# EAGLE board Mono_Audio_Amp-TPA2005D1_Panel_v11 (EAGLE 7.4.0), part 1 of 5
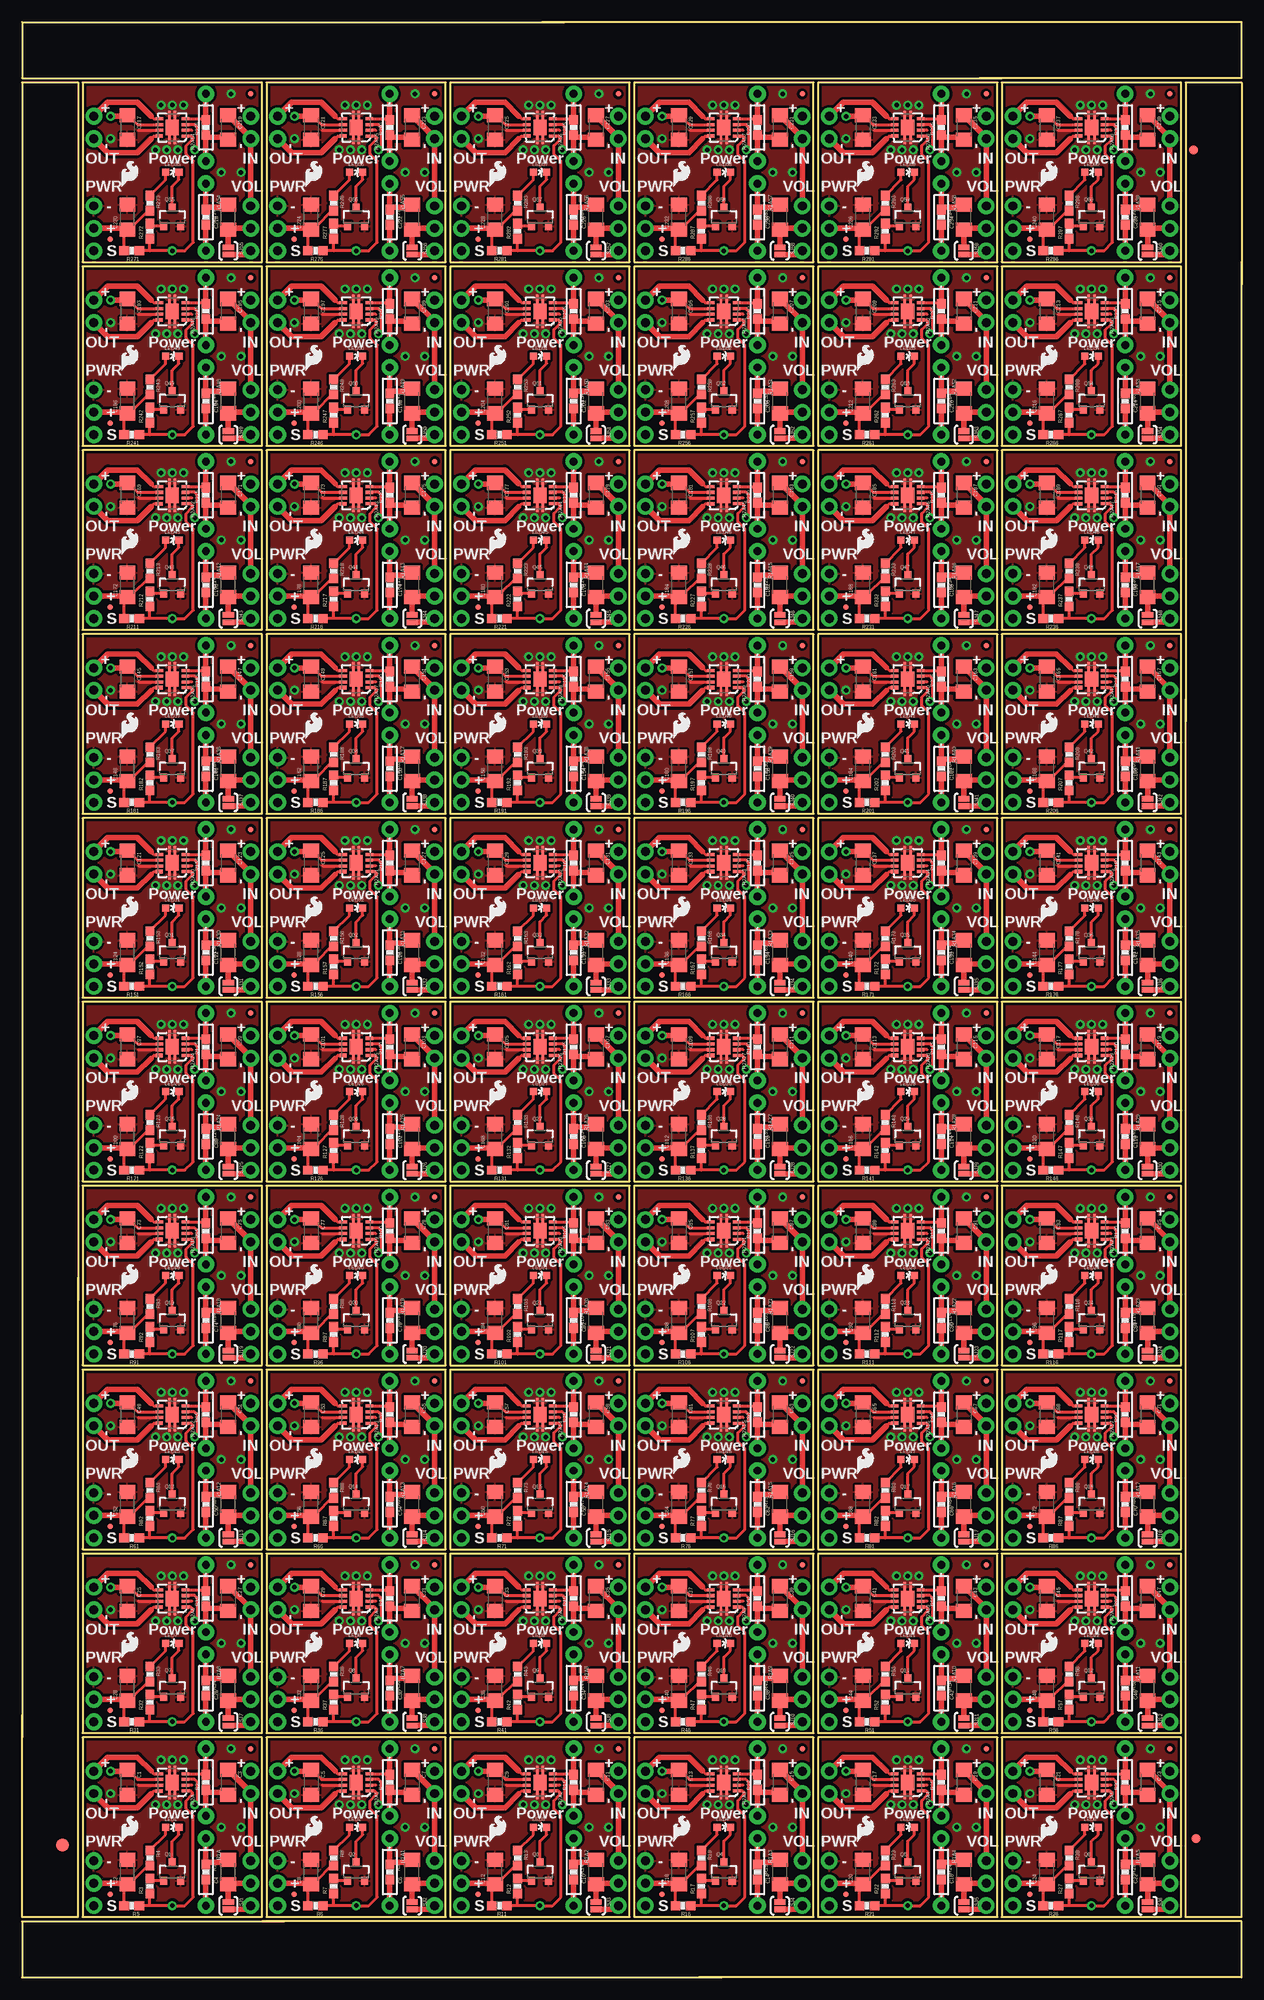
[diagram p0: board, top side]
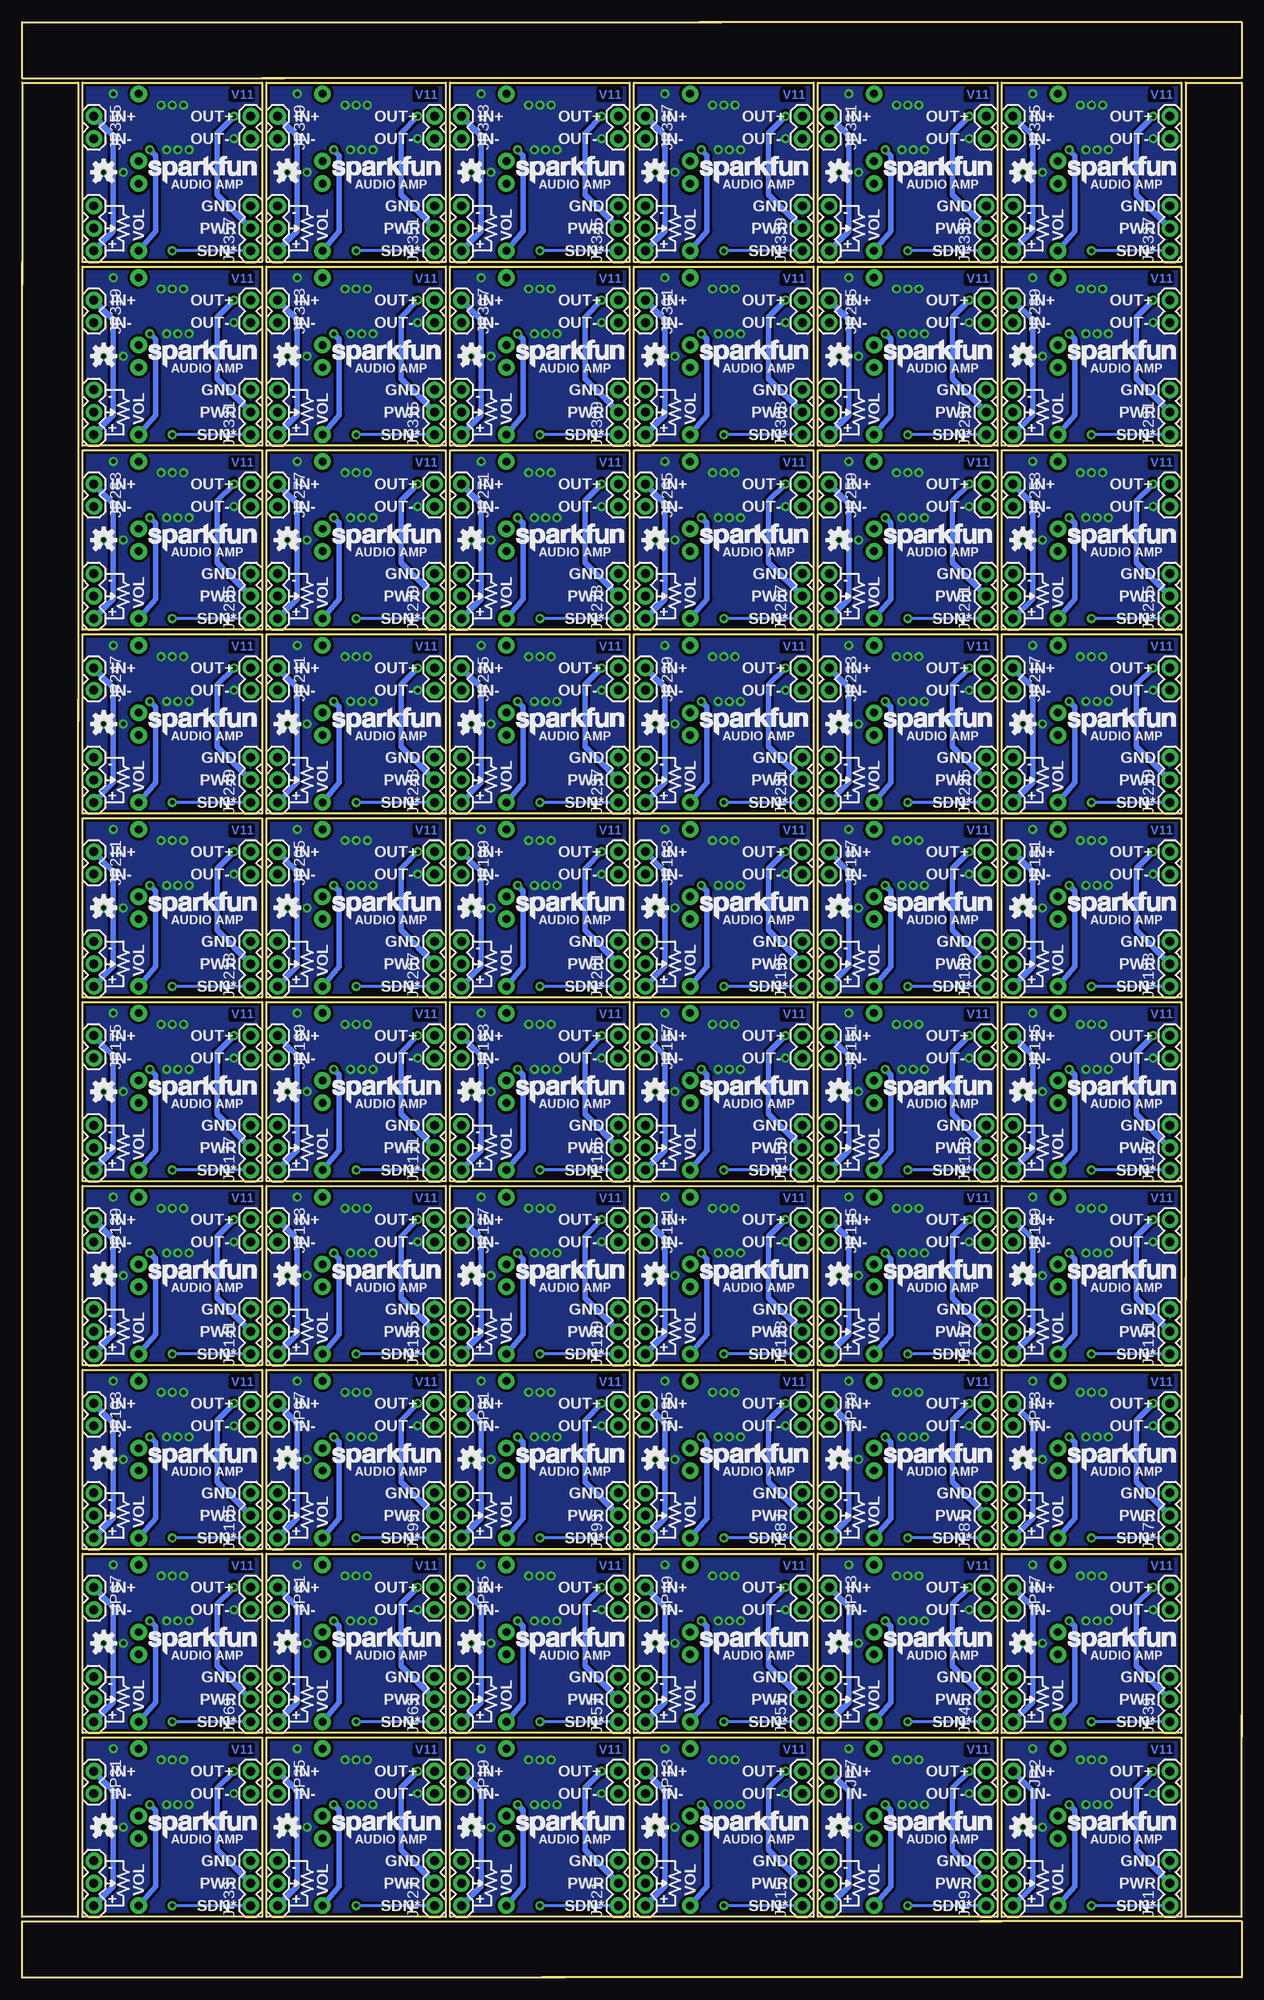
[diagram p1: board, bottom side, seen from below]

Size 138.18 x 221.49 mm. Coordinates in mm from the lower left corner, seen from the top.
Outline: 264 segments
Copper layers (1*16): Top 0.035mm / dielectric 1.5mm / Bottom 0.035mm
Design rules "default": minimum track width 8mil, minimum drill 20mil, track to track 8mil, track to pad 8mil, pad to pad 8mil, via to via 8mil, smd to smd 8mil, copper to edge 8mil, drill to drill 8mil, minimum pad ring 12mil, minimum via ring 10mil, stop-mask expansion 4mil, vias tented up to drill 20mil, thermal gap 10mil
Net classes: 0 default: clearance 0.254 mm; 1 VCC: width 0.254 mm, clearance 0.254 mm

## Footprints (pad centres in the part's own frame; a part is rotated, then mirrored left to right if it is on the bottom)
1206 = smd 1.6 x 1.8: 1 -1.4,0; 2 1.4,0
FIDUCIAL-1.5X3 = smd 1.5 x 1.5: 1 0,0
FIDUCIAL-1X2 = smd 1 x 1: 1 0,0
1X03 = drill 1.016 pad 1.88: 1 0,0; 2 2.54,0; 3 5.08,0
1X02 = drill 1.016 pad 1.88: 1 0,0; 2 2.54,0
MICRO-FIDUCIAL = smd 0.635 x 0.635: 1 0,0
LED-0603 = smd 0.8 x 0.8: A 0,-0.75; C 0,0.75
SOT23-3 = smd 0.8 x 0.9: 1 -0.95,-1; 2 0.95,-1; 3 0,1.1
0603-RES = smd 1.1 x 1: 1 -0.85,0; 2 0.85,0
AXIAL-0.3 = drill 0.9 pad 1.88: P$1 -3.81,0; P$2 3.81,0
SJ_2S-NOTRACE = smd 0.635 x 1.27: 1 -0.401,0; 2 0.413,0
QFN-8_PAD = smd 0.35 x 0.85: 1 -0.975,-1.475; 2 -0.325,-1.475; 3 0.325,-1.475; 4 0.975,-1.475; 5 0.975,1.475; 6 0.325,1.475; 7 -0.325,1.475; 8 -0.975,1.475 | smd 1.75 x 1.5: 9 0,0 | smd 1.025 x 0.28: 10 -1.387,-0.325; 11 1.387,-0.325; 12 1.387,0.325; 13 -1.387,0.325

## Placement (x,y rotation side)
C1  1uF  [1206]  11.94,22.1 270 top
C2  10uF  [1206]  11.94,11.94 90 top
C3  1uF  [1206]  23.37,22.1 270 top
C4  1uF  [1206]  23.37,11.94 90 top
C5  1uF  [1206]  32.77,22.1 270 top
C6  1uF  [1206]  44.2,11.94 90 top
C7  1uF  [1206]  44.2,22.1 270 top
C8  10uF  [1206]  32.77,11.94 90 top
C9  1uF  [1206]  53.59,22.1 270 top
C10  1uF  [1206]  65.02,11.94 90 top
C11  1uF  [1206]  65.02,22.1 270 top
C12  10uF  [1206]  53.59,11.94 90 top
C13  1uF  [1206]  74.42,22.1 270 top
C14  1uF  [1206]  85.85,11.94 90 top
C15  1uF  [1206]  85.85,22.1 270 top
C16  10uF  [1206]  74.42,11.94 90 top
C17  1uF  [1206]  95.25,22.1 270 top
C18  1uF  [1206]  106.68,11.94 90 top
C19  1uF  [1206]  106.68,22.1 270 top
C20  10uF  [1206]  95.25,11.94 90 top
C21  1uF  [1206]  116.08,22.1 270 top
C22  1uF  [1206]  127.51,11.94 90 top
C23  1uF  [1206]  127.51,22.1 270 top
C24  10uF  [1206]  116.08,11.94 90 top
C25  1uF  [1206]  11.94,42.93 270 top
C26  1uF  [1206]  23.37,32.77 90 top
C27  1uF  [1206]  23.37,42.93 270 top
C28  10uF  [1206]  11.94,32.77 90 top
C29  1uF  [1206]  32.77,42.93 270 top
C30  1uF  [1206]  44.2,32.77 90 top
C31  1uF  [1206]  44.2,42.93 270 top
C32  10uF  [1206]  32.77,32.77 90 top
C33  1uF  [1206]  53.59,42.93 270 top
C34  1uF  [1206]  65.02,32.77 90 top
C35  1uF  [1206]  65.02,42.93 270 top
C36  10uF  [1206]  53.59,32.77 90 top
C37  1uF  [1206]  74.42,42.93 270 top
C38  1uF  [1206]  85.85,32.77 90 top
C39  1uF  [1206]  85.85,42.93 270 top
C40  10uF  [1206]  74.42,32.77 90 top
C41  1uF  [1206]  95.25,42.93 270 top
C42  1uF  [1206]  106.68,32.77 90 top
C43  1uF  [1206]  106.68,42.93 270 top
C44  10uF  [1206]  95.25,32.77 90 top
C45  1uF  [1206]  116.08,42.93 270 top
C46  1uF  [1206]  127.51,32.77 90 top
C47  1uF  [1206]  127.51,42.93 270 top
C48  10uF  [1206]  116.08,32.77 90 top
C49  1uF  [1206]  11.94,63.75 270 top
C50  1uF  [1206]  23.37,53.59 90 top
C51  1uF  [1206]  23.37,63.75 270 top
C52  10uF  [1206]  11.94,53.59 90 top
C53  1uF  [1206]  32.77,63.75 270 top
C54  1uF  [1206]  44.2,53.59 90 top
C55  1uF  [1206]  44.2,63.75 270 top
C56  10uF  [1206]  32.77,53.59 90 top
C57  1uF  [1206]  53.59,63.75 270 top
C58  1uF  [1206]  65.02,53.59 90 top
C59  1uF  [1206]  65.02,63.75 270 top
C60  10uF  [1206]  53.59,53.59 90 top
C61  1uF  [1206]  74.42,63.75 270 top
C62  1uF  [1206]  85.85,53.59 90 top
C63  1uF  [1206]  85.85,63.75 270 top
C64  10uF  [1206]  74.42,53.59 90 top
C65  1uF  [1206]  95.25,63.75 270 top
C66  1uF  [1206]  106.68,53.59 90 top
C67  1uF  [1206]  106.68,63.75 270 top
C68  10uF  [1206]  95.25,53.59 90 top
C69  1uF  [1206]  116.08,63.75 270 top
C70  1uF  [1206]  127.51,53.59 90 top
C71  1uF  [1206]  127.51,63.75 270 top
C72  10uF  [1206]  116.08,53.59 90 top
C73  1uF  [1206]  11.94,84.58 270 top
C74  1uF  [1206]  23.37,74.42 90 top
C75  1uF  [1206]  23.37,84.58 270 top
C76  10uF  [1206]  11.94,74.42 90 top
C77  1uF  [1206]  32.77,84.58 270 top
C78  1uF  [1206]  44.2,74.42 90 top
C79  1uF  [1206]  44.2,84.58 270 top
C80  10uF  [1206]  32.77,74.42 90 top
C81  1uF  [1206]  53.59,84.58 270 top
C82  1uF  [1206]  65.02,74.42 90 top
C83  1uF  [1206]  65.02,84.58 270 top
C84  10uF  [1206]  53.59,74.42 90 top
C85  1uF  [1206]  74.42,84.58 270 top
C86  1uF  [1206]  85.85,74.42 90 top
C87  1uF  [1206]  85.85,84.58 270 top
C88  10uF  [1206]  74.42,74.42 90 top
C89  1uF  [1206]  95.25,84.58 270 top
C90  1uF  [1206]  106.68,74.42 90 top
C91  1uF  [1206]  106.68,84.58 270 top
C92  10uF  [1206]  95.25,74.42 90 top
C93  1uF  [1206]  116.08,84.58 270 top
C94  1uF  [1206]  127.51,74.42 90 top
C95  1uF  [1206]  127.51,84.58 270 top
C96  10uF  [1206]  116.08,74.42 90 top
C97  1uF  [1206]  11.94,105.41 270 top
C98  1uF  [1206]  23.37,95.25 90 top
C99  1uF  [1206]  23.37,105.41 270 top
C100  10uF  [1206]  11.94,95.25 90 top
C101  1uF  [1206]  32.77,105.41 270 top
C102  1uF  [1206]  44.2,95.25 90 top
C103  1uF  [1206]  44.2,105.41 270 top
C104  10uF  [1206]  32.77,95.25 90 top
C105  1uF  [1206]  53.59,105.41 270 top
C106  1uF  [1206]  65.02,95.25 90 top
C107  1uF  [1206]  65.02,105.41 270 top
C108  10uF  [1206]  53.59,95.25 90 top
C109  1uF  [1206]  74.42,105.41 270 top
C110  1uF  [1206]  85.85,95.25 90 top
C111  1uF  [1206]  85.85,105.41 270 top
C112  10uF  [1206]  74.42,95.25 90 top
C113  1uF  [1206]  95.25,105.41 270 top
C114  1uF  [1206]  106.68,95.25 90 top
C115  1uF  [1206]  106.68,105.41 270 top
C116  10uF  [1206]  95.25,95.25 90 top
C117  1uF  [1206]  116.08,105.41 270 top
C118  1uF  [1206]  127.51,95.25 90 top
C119  1uF  [1206]  127.51,105.41 270 top
C120  10uF  [1206]  116.08,95.25 90 top
C121  1uF  [1206]  11.94,126.24 270 top
C122  1uF  [1206]  23.37,116.08 90 top
C123  1uF  [1206]  23.37,126.24 270 top
C124  10uF  [1206]  11.94,116.08 90 top
C125  1uF  [1206]  32.77,126.24 270 top
C126  1uF  [1206]  44.2,116.08 90 top
C127  1uF  [1206]  44.2,126.24 270 top
C128  10uF  [1206]  32.77,116.08 90 top
C129  1uF  [1206]  53.59,126.24 270 top
C130  1uF  [1206]  65.02,116.08 90 top
C131  1uF  [1206]  65.02,126.24 270 top
C132  10uF  [1206]  53.59,116.08 90 top
C133  1uF  [1206]  74.42,126.24 270 top
C134  1uF  [1206]  85.85,116.08 90 top
C135  1uF  [1206]  85.85,126.24 270 top
C136  10uF  [1206]  74.42,116.08 90 top
C137  1uF  [1206]  95.25,126.24 270 top
C138  1uF  [1206]  106.68,116.08 90 top
C139  1uF  [1206]  106.68,126.24 270 top
C140  10uF  [1206]  95.25,116.08 90 top
C141  1uF  [1206]  116.08,126.24 270 top
C142  1uF  [1206]  127.51,116.08 90 top
C143  1uF  [1206]  127.51,126.24 270 top
C144  10uF  [1206]  116.08,116.08 90 top
C145  1uF  [1206]  11.94,147.07 270 top
C146  1uF  [1206]  23.37,136.91 90 top
C147  1uF  [1206]  23.37,147.07 270 top
C148  10uF  [1206]  11.94,136.91 90 top
C149  1uF  [1206]  32.77,147.07 270 top
C150  1uF  [1206]  44.2,136.91 90 top
C151  1uF  [1206]  44.2,147.07 270 top
C152  10uF  [1206]  32.77,136.91 90 top
C153  1uF  [1206]  53.59,147.07 270 top
C154  1uF  [1206]  65.02,136.91 90 top
C155  1uF  [1206]  65.02,147.07 270 top
C156  10uF  [1206]  53.59,136.91 90 top
C157  1uF  [1206]  74.42,147.07 270 top
C158  1uF  [1206]  85.85,136.91 90 top
C159  1uF  [1206]  85.85,147.07 270 top
C160  10uF  [1206]  74.42,136.91 90 top
C161  1uF  [1206]  95.25,147.07 270 top
C162  1uF  [1206]  106.68,136.91 90 top
C163  1uF  [1206]  106.68,147.07 270 top
C164  10uF  [1206]  95.25,136.91 90 top
C165  1uF  [1206]  116.08,147.07 270 top
C166  1uF  [1206]  127.51,136.91 90 top
C167  1uF  [1206]  127.51,147.07 270 top
C168  10uF  [1206]  116.08,136.91 90 top
C169  1uF  [1206]  11.94,167.89 270 top
C170  1uF  [1206]  23.37,157.73 90 top
C171  1uF  [1206]  23.37,167.89 270 top
C172  10uF  [1206]  11.94,157.73 90 top
C173  1uF  [1206]  32.77,167.89 270 top
C174  1uF  [1206]  44.2,157.73 90 top
C175  1uF  [1206]  44.2,167.89 270 top
C176  10uF  [1206]  32.77,157.73 90 top
C177  1uF  [1206]  53.59,167.89 270 top
C178  1uF  [1206]  65.02,157.73 90 top
C179  1uF  [1206]  65.02,167.89 270 top
C180  10uF  [1206]  53.59,157.73 90 top
C181  1uF  [1206]  74.42,167.89 270 top
C182  1uF  [1206]  85.85,157.73 90 top
C183  1uF  [1206]  85.85,167.89 270 top
C184  10uF  [1206]  74.42,157.73 90 top
C185  1uF  [1206]  95.25,167.89 270 top
C186  1uF  [1206]  106.68,157.73 90 top
C187  1uF  [1206]  106.68,167.89 270 top
C188  10uF  [1206]  95.25,157.73 90 top
C189  1uF  [1206]  116.08,167.89 270 top
C190  1uF  [1206]  127.51,157.73 90 top
C191  1uF  [1206]  127.51,167.89 270 top
C192  10uF  [1206]  116.08,157.73 90 top
C193  1uF  [1206]  11.94,188.72 270 top
C194  1uF  [1206]  23.37,178.56 90 top
C195  1uF  [1206]  23.37,188.72 270 top
C196  10uF  [1206]  11.94,178.56 90 top
C197  1uF  [1206]  32.77,188.72 270 top
C198  1uF  [1206]  44.2,178.56 90 top
C199  1uF  [1206]  44.2,188.72 270 top
C200  10uF  [1206]  32.77,178.56 90 top
C201  1uF  [1206]  53.59,188.72 270 top
C202  1uF  [1206]  65.02,178.56 90 top
C203  1uF  [1206]  65.02,188.72 270 top
C204  10uF  [1206]  53.59,178.56 90 top
C205  1uF  [1206]  74.42,188.72 270 top
C206  1uF  [1206]  85.85,178.56 90 top
C207  1uF  [1206]  85.85,188.72 270 top
C208  10uF  [1206]  74.42,178.56 90 top
C209  1uF  [1206]  95.25,188.72 270 top
C210  1uF  [1206]  106.68,178.56 90 top
C211  1uF  [1206]  106.68,188.72 270 top
C212  10uF  [1206]  95.25,178.56 90 top
C213  1uF  [1206]  116.08,188.72 270 top
C214  1uF  [1206]  127.51,178.56 90 top
C215  1uF  [1206]  127.51,188.72 270 top
C216  10uF  [1206]  116.08,178.56 90 top
C217  1uF  [1206]  11.94,209.55 270 top
C218  1uF  [1206]  23.37,199.39 90 top
C219  1uF  [1206]  23.37,209.55 270 top
C220  10uF  [1206]  11.94,199.39 90 top
C221  1uF  [1206]  32.77,209.55 270 top
C222  1uF  [1206]  44.2,199.39 90 top
C223  1uF  [1206]  44.2,209.55 270 top
C224  10uF  [1206]  32.77,199.39 90 top
C225  1uF  [1206]  53.59,209.55 270 top
C226  1uF  [1206]  65.02,199.39 90 top
C227  1uF  [1206]  65.02,209.55 270 top
C228  10uF  [1206]  53.59,199.39 90 top
C229  1uF  [1206]  74.42,209.55 270 top
C230  1uF  [1206]  85.85,199.39 90 top
C231  1uF  [1206]  85.85,209.55 270 top
C232  10uF  [1206]  74.42,199.39 90 top
C233  1uF  [1206]  95.25,209.55 270 top
C234  1uF  [1206]  106.68,199.39 90 top
C235  1uF  [1206]  106.68,209.55 270 top
C236  10uF  [1206]  95.25,199.39 90 top
C237  1uF  [1206]  116.08,209.55 270 top
C238  1uF  [1206]  127.51,199.39 90 top
C239  1uF  [1206]  127.51,209.55 270 top
C240  10uF  [1206]  116.08,199.39 90 top
E$1  [FIDUCIAL-1.5X3]  4.57,14.99 0 top
E$2  [FIDUCIAL-1X2]  132.97,15.75 180 top
E$5  [FIDUCIAL-1X2]  132.72,207.01 180 top
JP1  POWER  [1X03]  8.13,8.13 90 bottom
JP2  IN  [1X02]  25.91,23.37 270 bottom
JP3  OUT  [1X02]  8.13,23.37 270 bottom
JP4  VOLUME  [1X03]  25.91,8.13 90 bottom
JP5  FIDUCIALUFIDUCIAL  [MICRO-FIDUCIAL]  10.01,9.42 0 top
JP6  FIDUCIALUFIDUCIAL  [MICRO-FIDUCIAL]  25.91,25.91 0 top
JP7  IN  [1X02]  46.74,23.37 270 bottom
JP8  OUT  [1X02]  28.96,23.37 270 bottom
JP9  POWER  [1X03]  28.96,8.13 90 bottom
JP10  VOLUME  [1X03]  46.74,8.13 90 bottom
JP11  FIDUCIALUFIDUCIAL  [MICRO-FIDUCIAL]  30.84,9.42 0 top
JP12  FIDUCIALUFIDUCIAL  [MICRO-FIDUCIAL]  46.74,25.91 0 top
JP13  IN  [1X02]  67.56,23.37 270 bottom
JP14  OUT  [1X02]  49.78,23.37 270 bottom
JP15  POWER  [1X03]  49.78,8.13 90 bottom
JP16  VOLUME  [1X03]  67.56,8.13 90 bottom
JP17  FIDUCIALUFIDUCIAL  [MICRO-FIDUCIAL]  51.66,9.42 0 top
JP18  FIDUCIALUFIDUCIAL  [MICRO-FIDUCIAL]  67.56,25.91 0 top
JP19  IN  [1X02]  88.39,23.37 270 bottom
JP20  OUT  [1X02]  70.61,23.37 270 bottom
JP21  POWER  [1X03]  70.61,8.13 90 bottom
JP22  VOLUME  [1X03]  88.39,8.13 90 bottom
JP23  FIDUCIALUFIDUCIAL  [MICRO-FIDUCIAL]  72.49,9.42 0 top
JP24  FIDUCIALUFIDUCIAL  [MICRO-FIDUCIAL]  88.39,25.91 0 top
JP25  IN  [1X02]  109.22,23.37 270 bottom
JP26  OUT  [1X02]  91.44,23.37 270 bottom
JP27  POWER  [1X03]  91.44,8.13 90 bottom
JP28  VOLUME  [1X03]  109.22,8.13 90 bottom
JP29  FIDUCIALUFIDUCIAL  [MICRO-FIDUCIAL]  93.32,9.42 0 top
JP30  FIDUCIALUFIDUCIAL  [MICRO-FIDUCIAL]  109.22,25.91 0 top
JP31  IN  [1X02]  130.05,23.37 270 bottom
JP32  OUT  [1X02]  112.27,23.37 270 bottom
JP33  POWER  [1X03]  112.27,8.13 90 bottom
JP34  VOLUME  [1X03]  130.05,8.13 90 bottom
JP35  FIDUCIALUFIDUCIAL  [MICRO-FIDUCIAL]  114.15,9.42 0 top
JP36  FIDUCIALUFIDUCIAL  [MICRO-FIDUCIAL]  130.05,25.91 0 top
JP37  IN  [1X02]  25.91,44.2 270 bottom
JP38  OUT  [1X02]  8.13,44.2 270 bottom
JP39  POWER  [1X03]  8.13,28.96 90 bottom
JP40  VOLUME  [1X03]  25.91,28.96 90 bottom
JP41  FIDUCIALUFIDUCIAL  [MICRO-FIDUCIAL]  10.01,30.25 0 top
JP42  FIDUCIALUFIDUCIAL  [MICRO-FIDUCIAL]  25.91,46.74 0 top
JP43  IN  [1X02]  46.74,44.2 270 bottom
JP44  OUT  [1X02]  28.96,44.2 270 bottom
JP45  POWER  [1X03]  28.96,28.96 90 bottom
JP46  VOLUME  [1X03]  46.74,28.96 90 bottom
JP47  FIDUCIALUFIDUCIAL  [MICRO-FIDUCIAL]  30.84,30.25 0 top
JP48  FIDUCIALUFIDUCIAL  [MICRO-FIDUCIAL]  46.74,46.74 0 top
JP49  IN  [1X02]  67.56,44.2 270 bottom
JP50  OUT  [1X02]  49.78,44.2 270 bottom
JP51  POWER  [1X03]  49.78,28.96 90 bottom
JP52  VOLUME  [1X03]  67.56,28.96 90 bottom
JP53  FIDUCIALUFIDUCIAL  [MICRO-FIDUCIAL]  51.66,30.25 0 top
JP54  FIDUCIALUFIDUCIAL  [MICRO-FIDUCIAL]  67.56,46.74 0 top
JP55  IN  [1X02]  88.39,44.2 270 bottom
JP56  OUT  [1X02]  70.61,44.2 270 bottom
JP57  POWER  [1X03]  70.61,28.96 90 bottom
JP58  VOLUME  [1X03]  88.39,28.96 90 bottom
JP59  FIDUCIALUFIDUCIAL  [MICRO-FIDUCIAL]  72.49,30.25 0 top
JP60  FIDUCIALUFIDUCIAL  [MICRO-FIDUCIAL]  88.39,46.74 0 top
JP61  IN  [1X02]  109.22,44.2 270 bottom
JP62  OUT  [1X02]  91.44,44.2 270 bottom
JP63  POWER  [1X03]  91.44,28.96 90 bottom
JP64  VOLUME  [1X03]  109.22,28.96 90 bottom
JP65  FIDUCIALUFIDUCIAL  [MICRO-FIDUCIAL]  93.32,30.25 0 top
JP66  FIDUCIALUFIDUCIAL  [MICRO-FIDUCIAL]  109.22,46.74 0 top
JP67  IN  [1X02]  130.05,44.2 270 bottom
JP68  OUT  [1X02]  112.27,44.2 270 bottom
JP69  POWER  [1X03]  112.27,28.96 90 bottom
JP70  VOLUME  [1X03]  130.05,28.96 90 bottom
JP71  FIDUCIALUFIDUCIAL  [MICRO-FIDUCIAL]  114.15,30.25 0 top
JP72  FIDUCIALUFIDUCIAL  [MICRO-FIDUCIAL]  130.05,46.74 0 top
JP73  IN  [1X02]  25.91,65.02 270 bottom
JP74  OUT  [1X02]  8.13,65.02 270 bottom
JP75  POWER  [1X03]  8.13,49.78 90 bottom
JP76  VOLUME  [1X03]  25.91,49.78 90 bottom
JP77  FIDUCIALUFIDUCIAL  [MICRO-FIDUCIAL]  10.01,51.08 0 top
JP78  FIDUCIALUFIDUCIAL  [MICRO-FIDUCIAL]  25.91,67.56 0 top
JP79  IN  [1X02]  46.74,65.02 270 bottom
JP80  OUT  [1X02]  28.96,65.02 270 bottom
JP81  POWER  [1X03]  28.96,49.78 90 bottom
JP82  VOLUME  [1X03]  46.74,49.78 90 bottom
JP83  FIDUCIALUFIDUCIAL  [MICRO-FIDUCIAL]  30.84,51.08 0 top
JP84  FIDUCIALUFIDUCIAL  [MICRO-FIDUCIAL]  46.74,67.56 0 top
JP85  IN  [1X02]  67.56,65.02 270 bottom
JP86  OUT  [1X02]  49.78,65.02 270 bottom
JP87  POWER  [1X03]  49.78,49.78 90 bottom
JP88  VOLUME  [1X03]  67.56,49.78 90 bottom
JP89  FIDUCIALUFIDUCIAL  [MICRO-FIDUCIAL]  51.66,51.08 0 top
JP90  FIDUCIALUFIDUCIAL  [MICRO-FIDUCIAL]  67.56,67.56 0 top
JP91  IN  [1X02]  88.39,65.02 270 bottom
JP92  OUT  [1X02]  70.61,65.02 270 bottom
JP93  POWER  [1X03]  70.61,49.78 90 bottom
JP94  VOLUME  [1X03]  88.39,49.78 90 bottom
JP95  FIDUCIALUFIDUCIAL  [MICRO-FIDUCIAL]  72.49,51.08 0 top
JP96  FIDUCIALUFIDUCIAL  [MICRO-FIDUCIAL]  88.39,67.56 0 top
JP97  IN  [1X02]  109.22,65.02 270 bottom
JP98  OUT  [1X02]  91.44,65.02 270 bottom
JP99  POWER  [1X03]  91.44,49.78 90 bottom
JP100  VOLUME  [1X03]  109.22,49.78 90 bottom
JP101  FIDUCIALUFIDUCIAL  [MICRO-FIDUCIAL]  93.32,51.08 0 top
JP102  FIDUCIALUFIDUCIAL  [MICRO-FIDUCIAL]  109.22,67.56 0 top
JP103  IN  [1X02]  130.05,65.02 270 bottom
JP104  OUT  [1X02]  112.27,65.02 270 bottom
JP105  POWER  [1X03]  112.27,49.78 90 bottom
JP106  VOLUME  [1X03]  130.05,49.78 90 bottom
JP107  FIDUCIALUFIDUCIAL  [MICRO-FIDUCIAL]  114.15,51.08 0 top
JP108  FIDUCIALUFIDUCIAL  [MICRO-FIDUCIAL]  130.05,67.56 0 top
JP109  IN  [1X02]  25.91,85.85 270 bottom
JP110  OUT  [1X02]  8.13,85.85 270 bottom
JP111  POWER  [1X03]  8.13,70.61 90 bottom
JP112  VOLUME  [1X03]  25.91,70.61 90 bottom
JP113  FIDUCIALUFIDUCIAL  [MICRO-FIDUCIAL]  10.01,71.91 0 top
JP114  FIDUCIALUFIDUCIAL  [MICRO-FIDUCIAL]  25.91,88.39 0 top
JP115  IN  [1X02]  46.74,85.85 270 bottom
JP116  OUT  [1X02]  28.96,85.85 270 bottom
JP117  POWER  [1X03]  28.96,70.61 90 bottom
JP118  VOLUME  [1X03]  46.74,70.61 90 bottom
JP119  FIDUCIALUFIDUCIAL  [MICRO-FIDUCIAL]  30.84,71.91 0 top
JP120  FIDUCIALUFIDUCIAL  [MICRO-FIDUCIAL]  46.74,88.39 0 top
JP121  IN  [1X02]  67.56,85.85 270 bottom
JP122  OUT  [1X02]  49.78,85.85 270 bottom
JP123  POWER  [1X03]  49.78,70.61 90 bottom
JP124  VOLUME  [1X03]  67.56,70.61 90 bottom
JP125  FIDUCIALUFIDUCIAL  [MICRO-FIDUCIAL]  51.66,71.91 0 top
JP126  FIDUCIALUFIDUCIAL  [MICRO-FIDUCIAL]  67.56,88.39 0 top
JP127  IN  [1X02]  88.39,85.85 270 bottom
JP128  OUT  [1X02]  70.61,85.85 270 bottom
JP129  POWER  [1X03]  70.61,70.61 90 bottom
JP130  VOLUME  [1X03]  88.39,70.61 90 bottom
JP131  FIDUCIALUFIDUCIAL  [MICRO-FIDUCIAL]  72.49,71.91 0 top
JP132  FIDUCIALUFIDUCIAL  [MICRO-FIDUCIAL]  88.39,88.39 0 top
JP133  IN  [1X02]  109.22,85.85 270 bottom
JP134  OUT  [1X02]  91.44,85.85 270 bottom
JP135  POWER  [1X03]  91.44,70.61 90 bottom
JP136  VOLUME  [1X03]  109.22,70.61 90 bottom
JP137  FIDUCIALUFIDUCIAL  [MICRO-FIDUCIAL]  93.32,71.91 0 top
JP138  FIDUCIALUFIDUCIAL  [MICRO-FIDUCIAL]  109.22,88.39 0 top
JP139  IN  [1X02]  130.05,85.85 270 bottom
JP140  OUT  [1X02]  112.27,85.85 270 bottom
JP141  POWER  [1X03]  112.27,70.61 90 bottom
JP142  VOLUME  [1X03]  130.05,70.61 90 bottom
JP143  FIDUCIALUFIDUCIAL  [MICRO-FIDUCIAL]  114.15,71.91 0 top
JP144  FIDUCIALUFIDUCIAL  [MICRO-FIDUCIAL]  130.05,88.39 0 top
JP145  IN  [1X02]  25.91,106.68 270 bottom
JP146  OUT  [1X02]  8.13,106.68 270 bottom
JP147  POWER  [1X03]  8.13,91.44 90 bottom
JP148  VOLUME  [1X03]  25.91,91.44 90 bottom
JP149  FIDUCIALUFIDUCIAL  [MICRO-FIDUCIAL]  10.01,92.74 0 top
JP150  FIDUCIALUFIDUCIAL  [MICRO-FIDUCIAL]  25.91,109.22 0 top
JP151  IN  [1X02]  46.74,106.68 270 bottom
JP152  OUT  [1X02]  28.96,106.68 270 bottom
JP153  POWER  [1X03]  28.96,91.44 90 bottom
JP154  VOLUME  [1X03]  46.74,91.44 90 bottom
JP155  FIDUCIALUFIDUCIAL  [MICRO-FIDUCIAL]  30.84,92.74 0 top
JP156  FIDUCIALUFIDUCIAL  [MICRO-FIDUCIAL]  46.74,109.22 0 top
JP157  IN  [1X02]  67.56,106.68 270 bottom
JP158  OUT  [1X02]  49.78,106.68 270 bottom
JP159  POWER  [1X03]  49.78,91.44 90 bottom
JP160  VOLUME  [1X03]  67.56,91.44 90 bottom
JP161  FIDUCIALUFIDUCIAL  [MICRO-FIDUCIAL]  51.66,92.74 0 top
JP162  FIDUCIALUFIDUCIAL  [MICRO-FIDUCIAL]  67.56,109.22 0 top
JP163  IN  [1X02]  88.39,106.68 270 bottom
JP164  OUT  [1X02]  70.61,106.68 270 bottom
JP165  POWER  [1X03]  70.61,91.44 90 bottom
JP166  VOLUME  [1X03]  88.39,91.44 90 bottom
JP167  FIDUCIALUFIDUCIAL  [MICRO-FIDUCIAL]  72.49,92.74 0 top
JP168  FIDUCIALUFIDUCIAL  [MICRO-FIDUCIAL]  88.39,109.22 0 top
JP169  IN  [1X02]  109.22,106.68 270 bottom
JP170  OUT  [1X02]  91.44,106.68 270 bottom
JP171  POWER  [1X03]  91.44,91.44 90 bottom
JP172  VOLUME  [1X03]  109.22,91.44 90 bottom
JP173  FIDUCIALUFIDUCIAL  [MICRO-FIDUCIAL]  93.32,92.74 0 top
JP174  FIDUCIALUFIDUCIAL  [MICRO-FIDUCIAL]  109.22,109.22 0 top
JP175  IN  [1X02]  130.05,106.68 270 bottom
JP176  OUT  [1X02]  112.27,106.68 270 bottom
JP177  POWER  [1X03]  112.27,91.44 90 bottom
JP178  VOLUME  [1X03]  130.05,91.44 90 bottom
JP179  FIDUCIALUFIDUCIAL  [MICRO-FIDUCIAL]  114.15,92.74 0 top
JP180  FIDUCIALUFIDUCIAL  [MICRO-FIDUCIAL]  130.05,109.22 0 top
JP181  IN  [1X02]  25.91,127.51 270 bottom
JP182  OUT  [1X02]  8.13,127.51 270 bottom
JP183  POWER  [1X03]  8.13,112.27 90 bottom
JP184  VOLUME  [1X03]  25.91,112.27 90 bottom
JP185  FIDUCIALUFIDUCIAL  [MICRO-FIDUCIAL]  10.01,113.56 0 top
JP186  FIDUCIALUFIDUCIAL  [MICRO-FIDUCIAL]  25.91,130.05 0 top
JP187  IN  [1X02]  46.74,127.51 270 bottom
JP188  OUT  [1X02]  28.96,127.51 270 bottom
JP189  POWER  [1X03]  28.96,112.27 90 bottom
JP190  VOLUME  [1X03]  46.74,112.27 90 bottom
JP191  FIDUCIALUFIDUCIAL  [MICRO-FIDUCIAL]  30.84,113.56 0 top
JP192  FIDUCIALUFIDUCIAL  [MICRO-FIDUCIAL]  46.74,130.05 0 top
JP193  IN  [1X02]  67.56,127.51 270 bottom
JP194  OUT  [1X02]  49.78,127.51 270 bottom
JP195  POWER  [1X03]  49.78,112.27 90 bottom
JP196  VOLUME  [1X03]  67.56,112.27 90 bottom
JP197  FIDUCIALUFIDUCIAL  [MICRO-FIDUCIAL]  51.66,113.56 0 top
JP198  FIDUCIALUFIDUCIAL  [MICRO-FIDUCIAL]  67.56,130.05 0 top
JP199  IN  [1X02]  88.39,127.51 270 bottom
JP200  OUT  [1X02]  70.61,127.51 270 bottom
JP201  POWER  [1X03]  70.61,112.27 90 bottom
JP202  VOLUME  [1X03]  88.39,112.27 90 bottom
JP203  FIDUCIALUFIDUCIAL  [MICRO-FIDUCIAL]  72.49,113.56 0 top
JP204  FIDUCIALUFIDUCIAL  [MICRO-FIDUCIAL]  88.39,130.05 0 top
JP205  IN  [1X02]  109.22,127.51 270 bottom
JP206  OUT  [1X02]  91.44,127.51 270 bottom
JP207  POWER  [1X03]  91.44,112.27 90 bottom
JP208  VOLUME  [1X03]  109.22,112.27 90 bottom
JP209  FIDUCIALUFIDUCIAL  [MICRO-FIDUCIAL]  93.32,113.56 0 top
JP210  FIDUCIALUFIDUCIAL  [MICRO-FIDUCIAL]  109.22,130.05 0 top
JP211  IN  [1X02]  130.05,127.51 270 bottom
JP212  OUT  [1X02]  112.27,127.51 270 bottom
JP213  POWER  [1X03]  112.27,112.27 90 bottom
JP214  VOLUME  [1X03]  130.05,112.27 90 bottom
JP215  FIDUCIALUFIDUCIAL  [MICRO-FIDUCIAL]  114.15,113.56 0 top
JP216  FIDUCIALUFIDUCIAL  [MICRO-FIDUCIAL]  130.05,130.05 0 top
JP217  IN  [1X02]  25.91,148.34 270 bottom
JP218  OUT  [1X02]  8.13,148.34 270 bottom
JP219  POWER  [1X03]  8.13,133.1 90 bottom
JP220  VOLUME  [1X03]  25.91,133.1 90 bottom
JP221  FIDUCIALUFIDUCIAL  [MICRO-FIDUCIAL]  10.01,134.39 0 top
JP222  FIDUCIALUFIDUCIAL  [MICRO-FIDUCIAL]  25.91,150.88 0 top
JP223  IN  [1X02]  46.74,148.34 270 bottom
JP224  OUT  [1X02]  28.96,148.34 270 bottom
JP225  POWER  [1X03]  28.96,133.1 90 bottom
JP226  VOLUME  [1X03]  46.74,133.1 90 bottom
JP227  FIDUCIALUFIDUCIAL  [MICRO-FIDUCIAL]  30.84,134.39 0 top
JP228  FIDUCIALUFIDUCIAL  [MICRO-FIDUCIAL]  46.74,150.88 0 top
JP229  IN  [1X02]  67.56,148.34 270 bottom
JP230  OUT  [1X02]  49.78,148.34 270 bottom
JP231  POWER  [1X03]  49.78,133.1 90 bottom
JP232  VOLUME  [1X03]  67.56,133.1 90 bottom
JP233  FIDUCIALUFIDUCIAL  [MICRO-FIDUCIAL]  51.66,134.39 0 top
JP234  FIDUCIALUFIDUCIAL  [MICRO-FIDUCIAL]  67.56,150.88 0 top
JP235  IN  [1X02]  88.39,148.34 270 bottom
JP236  OUT  [1X02]  70.61,148.34 270 bottom
JP237  POWER  [1X03]  70.61,133.1 90 bottom
JP238  VOLUME  [1X03]  88.39,133.1 90 bottom
JP239  FIDUCIALUFIDUCIAL  [MICRO-FIDUCIAL]  72.49,134.39 0 top
JP240  FIDUCIALUFIDUCIAL  [MICRO-FIDUCIAL]  88.39,150.88 0 top
JP241  IN  [1X02]  109.22,148.34 270 bottom
JP242  OUT  [1X02]  91.44,148.34 270 bottom
JP243  POWER  [1X03]  91.44,133.1 90 bottom
JP244  VOLUME  [1X03]  109.22,133.1 90 bottom
JP245  FIDUCIALUFIDUCIAL  [MICRO-FIDUCIAL]  93.32,134.39 0 top
JP246  FIDUCIALUFIDUCIAL  [MICRO-FIDUCIAL]  109.22,150.88 0 top
JP247  IN  [1X02]  130.05,148.34 270 bottom
JP248  OUT  [1X02]  112.27,148.34 270 bottom
JP249  POWER  [1X03]  112.27,133.1 90 bottom
JP250  VOLUME  [1X03]  130.05,133.1 90 bottom
JP251  FIDUCIALUFIDUCIAL  [MICRO-FIDUCIAL]  114.15,134.39 0 top
JP252  FIDUCIALUFIDUCIAL  [MICRO-FIDUCIAL]  130.05,150.88 0 top
JP253  IN  [1X02]  25.91,169.16 270 bottom
JP254  OUT  [1X02]  8.13,169.16 270 bottom
JP255  POWER  [1X03]  8.13,153.92 90 bottom
JP256  VOLUME  [1X03]  25.91,153.92 90 bottom
JP257  FIDUCIALUFIDUCIAL  [MICRO-FIDUCIAL]  10.01,155.22 0 top
JP258  FIDUCIALUFIDUCIAL  [MICRO-FIDUCIAL]  25.91,171.7 0 top
JP259  IN  [1X02]  46.74,169.16 270 bottom
JP260  OUT  [1X02]  28.96,169.16 270 bottom
JP261  POWER  [1X03]  28.96,153.92 90 bottom
JP262  VOLUME  [1X03]  46.74,153.92 90 bottom
JP263  FIDUCIALUFIDUCIAL  [MICRO-FIDUCIAL]  30.84,155.22 0 top
JP264  FIDUCIALUFIDUCIAL  [MICRO-FIDUCIAL]  46.74,171.7 0 top
JP265  IN  [1X02]  67.56,169.16 270 bottom
JP266  OUT  [1X02]  49.78,169.16 270 bottom
JP267  POWER  [1X03]  49.78,153.92 90 bottom
JP268  VOLUME  [1X03]  67.56,153.92 90 bottom
JP269  FIDUCIALUFIDUCIAL  [MICRO-FIDUCIAL]  51.66,155.22 0 top
JP270  FIDUCIALUFIDUCIAL  [MICRO-FIDUCIAL]  67.56,171.7 0 top
JP271  IN  [1X02]  88.39,169.16 270 bottom
JP272  OUT  [1X02]  70.61,169.16 270 bottom
JP273  POWER  [1X03]  70.61,153.92 90 bottom
JP274  VOLUME  [1X03]  88.39,153.92 90 bottom
JP275  FIDUCIALUFIDUCIAL  [MICRO-FIDUCIAL]  72.49,155.22 0 top
JP276  FIDUCIALUFIDUCIAL  [MICRO-FIDUCIAL]  88.39,171.7 0 top
JP277  IN  [1X02]  109.22,169.16 270 bottom
JP278  OUT  [1X02]  91.44,169.16 270 bottom
JP279  POWER  [1X03]  91.44,153.92 90 bottom
JP280  VOLUME  [1X03]  109.22,153.92 90 bottom
JP281  FIDUCIALUFIDUCIAL  [MICRO-FIDUCIAL]  93.32,155.22 0 top
JP282  FIDUCIALUFIDUCIAL  [MICRO-FIDUCIAL]  109.22,171.7 0 top
JP283  IN  [1X02]  130.05,169.16 270 bottom
JP284  OUT  [1X02]  112.27,169.16 270 bottom
JP285  POWER  [1X03]  112.27,153.92 90 bottom
JP286  VOLUME  [1X03]  130.05,153.92 90 bottom
JP287  FIDUCIALUFIDUCIAL  [MICRO-FIDUCIAL]  114.15,155.22 0 top
JP288  FIDUCIALUFIDUCIAL  [MICRO-FIDUCIAL]  130.05,171.7 0 top
JP289  IN  [1X02]  25.91,189.99 270 bottom
JP290  OUT  [1X02]  8.13,189.99 270 bottom
JP291  POWER  [1X03]  8.13,174.75 90 bottom
JP292  VOLUME  [1X03]  25.91,174.75 90 bottom
JP293  FIDUCIALUFIDUCIAL  [MICRO-FIDUCIAL]  10.01,176.05 0 top
JP294  FIDUCIALUFIDUCIAL  [MICRO-FIDUCIAL]  25.91,192.53 0 top
JP295  IN  [1X02]  46.74,189.99 270 bottom
JP296  OUT  [1X02]  28.96,189.99 270 bottom
JP297  POWER  [1X03]  28.96,174.75 90 bottom
JP298  VOLUME  [1X03]  46.74,174.75 90 bottom
JP299  FIDUCIALUFIDUCIAL  [MICRO-FIDUCIAL]  30.84,176.05 0 top
JP300  FIDUCIALUFIDUCIAL  [MICRO-FIDUCIAL]  46.74,192.53 0 top
JP301  IN  [1X02]  67.56,189.99 270 bottom
JP302  OUT  [1X02]  49.78,189.99 270 bottom
JP303  POWER  [1X03]  49.78,174.75 90 bottom
JP304  VOLUME  [1X03]  67.56,174.75 90 bottom
JP305  FIDUCIALUFIDUCIAL  [MICRO-FIDUCIAL]  51.66,176.05 0 top
JP306  FIDUCIALUFIDUCIAL  [MICRO-FIDUCIAL]  67.56,192.53 0 top
JP307  IN  [1X02]  88.39,189.99 270 bottom
JP308  OUT  [1X02]  70.61,189.99 270 bottom
JP309  POWER  [1X03]  70.61,174.75 90 bottom
JP310  VOLUME  [1X03]  88.39,174.75 90 bottom
JP311  FIDUCIALUFIDUCIAL  [MICRO-FIDUCIAL]  72.49,176.05 0 top
JP312  FIDUCIALUFIDUCIAL  [MICRO-FIDUCIAL]  88.39,192.53 0 top
JP313  IN  [1X02]  109.22,189.99 270 bottom
JP314  OUT  [1X02]  91.44,189.99 270 bottom
JP315  POWER  [1X03]  91.44,174.75 90 bottom
JP316  VOLUME  [1X03]  109.22,174.75 90 bottom
JP317  FIDUCIALUFIDUCIAL  [MICRO-FIDUCIAL]  93.32,176.05 0 top
JP318  FIDUCIALUFIDUCIAL  [MICRO-FIDUCIAL]  109.22,192.53 0 top
JP319  IN  [1X02]  130.05,189.99 270 bottom
JP320  OUT  [1X02]  112.27,189.99 270 bottom
JP321  POWER  [1X03]  112.27,174.75 90 bottom
JP322  VOLUME  [1X03]  130.05,174.75 90 bottom
JP323  FIDUCIALUFIDUCIAL  [MICRO-FIDUCIAL]  114.15,176.05 0 top
JP324  FIDUCIALUFIDUCIAL  [MICRO-FIDUCIAL]  130.05,192.53 0 top
JP325  IN  [1X02]  25.91,210.82 270 bottom
JP326  OUT  [1X02]  8.13,210.82 270 bottom
JP327  POWER  [1X03]  8.13,195.58 90 bottom
JP328  VOLUME  [1X03]  25.91,195.58 90 bottom
JP329  FIDUCIALUFIDUCIAL  [MICRO-FIDUCIAL]  10.01,196.88 0 top
JP330  FIDUCIALUFIDUCIAL  [MICRO-FIDUCIAL]  25.91,213.36 0 top
JP331  IN  [1X02]  46.74,210.82 270 bottom
JP332  OUT  [1X02]  28.96,210.82 270 bottom
JP333  POWER  [1X03]  28.96,195.58 90 bottom
JP334  VOLUME  [1X03]  46.74,195.58 90 bottom
JP335  FIDUCIALUFIDUCIAL  [MICRO-FIDUCIAL]  30.84,196.88 0 top
JP336  FIDUCIALUFIDUCIAL  [MICRO-FIDUCIAL]  46.74,213.36 0 top
JP337  IN  [1X02]  67.56,210.82 270 bottom
JP338  OUT  [1X02]  49.78,210.82 270 bottom
JP339  POWER  [1X03]  49.78,195.58 90 bottom
JP340  VOLUME  [1X03]  67.56,195.58 90 bottom
JP341  FIDUCIALUFIDUCIAL  [MICRO-FIDUCIAL]  51.66,196.88 0 top
JP342  FIDUCIALUFIDUCIAL  [MICRO-FIDUCIAL]  67.56,213.36 0 top
JP343  IN  [1X02]  88.39,210.82 270 bottom
JP344  OUT  [1X02]  70.61,210.82 270 bottom
JP345  POWER  [1X03]  70.61,195.58 90 bottom
JP346  VOLUME  [1X03]  88.39,195.58 90 bottom
JP347  FIDUCIALUFIDUCIAL  [MICRO-FIDUCIAL]  72.49,196.88 0 top
JP348  FIDUCIALUFIDUCIAL  [MICRO-FIDUCIAL]  88.39,213.36 0 top
JP349  IN  [1X02]  109.22,210.82 270 bottom
JP350  OUT  [1X02]  91.44,210.82 270 bottom
JP351  POWER  [1X03]  91.44,195.58 90 bottom
JP352  VOLUME  [1X03]  109.22,195.58 90 bottom
JP353  FIDUCIALUFIDUCIAL  [MICRO-FIDUCIAL]  93.32,196.88 0 top
JP354  FIDUCIALUFIDUCIAL  [MICRO-FIDUCIAL]  109.22,213.36 0 top
JP355  IN  [1X02]  130.05,210.82 270 bottom
JP356  OUT  [1X02]  112.27,210.82 270 bottom
JP357  POWER  [1X03]  112.27,195.58 90 bottom
JP358  VOLUME  [1X03]  130.05,195.58 90 bottom
JP359  FIDUCIALUFIDUCIAL  [MICRO-FIDUCIAL]  114.15,196.88 0 top
JP360  FIDUCIALUFIDUCIAL  [MICRO-FIDUCIAL]  130.05,213.36 0 top
LED1  [LED-0603]  17.02,17.02 270 top
LED2  [LED-0603]  37.85,17.02 270 top
LED3  [LED-0603]  58.67,17.02 270 top
LED4  [LED-0603]  79.5,17.02 270 top
LED5  [LED-0603]  100.33,17.02 270 top
LED6  [LED-0603]  121.16,17.02 270 top
LED7  [LED-0603]  17.02,37.85 270 top
LED8  [LED-0603]  37.85,37.85 270 top
LED9  [LED-0603]  58.67,37.85 270 top
LED10  [LED-0603]  79.5,37.85 270 top
LED11  [LED-0603]  100.33,37.85 270 top
LED12  [LED-0603]  121.16,37.85 270 top
LED13  [LED-0603]  17.02,58.67 270 top
LED14  [LED-0603]  37.85,58.67 270 top
LED15  [LED-0603]  58.67,58.67 270 top
LED16  [LED-0603]  79.5,58.67 270 top
LED17  [LED-0603]  100.33,58.67 270 top
LED18  [LED-0603]  121.16,58.67 270 top
LED19  [LED-0603]  17.02,79.5 270 top
LED20  [LED-0603]  37.85,79.5 270 top
LED21  [LED-0603]  58.67,79.5 270 top
LED22  [LED-0603]  79.5,79.5 270 top
LED23  [LED-0603]  100.33,79.5 270 top
LED24  [LED-0603]  121.16,79.5 270 top
LED25  [LED-0603]  17.02,100.33 270 top
LED26  [LED-0603]  37.85,100.33 270 top
LED27  [LED-0603]  58.67,100.33 270 top
LED28  [LED-0603]  79.5,100.33 270 top
LED29  [LED-0603]  100.33,100.33 270 top
LED30  [LED-0603]  121.16,100.33 270 top
LED31  [LED-0603]  17.02,121.16 270 top
LED32  [LED-0603]  37.85,121.16 270 top
LED33  [LED-0603]  58.67,121.16 270 top
LED34  [LED-0603]  79.5,121.16 270 top
LED35  [LED-0603]  100.33,121.16 270 top
LED36  [LED-0603]  121.16,121.16 270 top
LED37  [LED-0603]  17.02,141.99 270 top
LED38  [LED-0603]  37.85,141.99 270 top
LED39  [LED-0603]  58.67,141.99 270 top
LED40  [LED-0603]  79.5,141.99 270 top
LED41  [LED-0603]  100.33,141.99 270 top
LED42  [LED-0603]  121.16,141.99 270 top
LED43  [LED-0603]  17.02,162.81 270 top
LED44  [LED-0603]  37.85,162.81 270 top
LED45  [LED-0603]  58.67,162.81 270 top
LED46  [LED-0603]  79.5,162.81 270 top
LED47  [LED-0603]  100.33,162.81 270 top
LED48  [LED-0603]  121.16,162.81 270 top
LED49  [LED-0603]  17.02,183.64 270 top
LED50  [LED-0603]  37.85,183.64 270 top
LED51  [LED-0603]  58.67,183.64 270 top
LED52  [LED-0603]  79.5,183.64 270 top
LED53  [LED-0603]  100.33,183.64 270 top
LED54  [LED-0603]  121.16,183.64 270 top
LED55  [LED-0603]  17.02,204.47 270 top
LED56  [LED-0603]  37.85,204.47 270 top
LED57  [LED-0603]  58.67,204.47 270 top
LED58  [LED-0603]  79.5,204.47 270 top
LED59  [LED-0603]  100.33,204.47 270 top
LED60  [LED-0603]  121.16,204.47 270 top
LOGO1  LOGO-SFENW2  [SFE-NEW-WEB]  19.72,15.75 0 bottom
LOGO2  LOGO-SFESK  [SFE-LOGO-FLAME]  11.3,15.43 0 top
LOGO3  LOGO-SFENW2  [SFE-NEW-WEB]  40.54,15.75 0 bottom
LOGO4  LOGO-SFESK  [SFE-LOGO-FLAME]  32.13,15.43 0 top
LOGO5  LOGO-SFENW2  [SFE-NEW-WEB]  61.37,15.75 0 bottom
LOGO6  LOGO-SFESK  [SFE-LOGO-FLAME]  52.96,15.43 0 top
LOGO7  LOGO-SFENW2  [SFE-NEW-WEB]  82.2,15.75 0 bottom
LOGO8  LOGO-SFESK  [SFE-LOGO-FLAME]  73.79,15.43 0 top
LOGO9  LOGO-SFENW2  [SFE-NEW-WEB]  103.03,15.75 0 bottom
LOGO10  LOGO-SFESK  [SFE-LOGO-FLAME]  94.61,15.43 0 top
LOGO11  LOGO-SFENW2  [SFE-NEW-WEB]  123.86,15.75 0 bottom
LOGO12  LOGO-SFESK  [SFE-LOGO-FLAME]  115.44,15.43 0 top
LOGO13  LOGO-SFENW2  [SFE-NEW-WEB]  19.72,36.58 0 bottom
LOGO14  LOGO-SFESK  [SFE-LOGO-FLAME]  11.3,36.26 0 top
LOGO15  LOGO-SFENW2  [SFE-NEW-WEB]  40.54,36.58 0 bottom
LOGO16  LOGO-SFESK  [SFE-LOGO-FLAME]  32.13,36.26 0 top
LOGO17  LOGO-SFENW2  [SFE-NEW-WEB]  61.37,36.58 0 bottom
LOGO18  LOGO-SFESK  [SFE-LOGO-FLAME]  52.96,36.26 0 top
LOGO19  LOGO-SFENW2  [SFE-NEW-WEB]  82.2,36.58 0 bottom
LOGO20  LOGO-SFESK  [SFE-LOGO-FLAME]  73.79,36.26 0 top
LOGO21  LOGO-SFENW2  [SFE-NEW-WEB]  103.03,36.58 0 bottom
LOGO22  LOGO-SFESK  [SFE-LOGO-FLAME]  94.61,36.26 0 top
LOGO23  LOGO-SFENW2  [SFE-NEW-WEB]  123.86,36.58 0 bottom
LOGO24  LOGO-SFESK  [SFE-LOGO-FLAME]  115.44,36.26 0 top
LOGO25  LOGO-SFENW2  [SFE-NEW-WEB]  19.72,57.4 0 bottom
LOGO26  LOGO-SFESK  [SFE-LOGO-FLAME]  11.3,57.09 0 top
LOGO27  LOGO-SFENW2  [SFE-NEW-WEB]  40.54,57.4 0 bottom
LOGO28  LOGO-SFESK  [SFE-LOGO-FLAME]  32.13,57.09 0 top
LOGO29  LOGO-SFENW2  [SFE-NEW-WEB]  61.37,57.4 0 bottom
LOGO30  LOGO-SFESK  [SFE-LOGO-FLAME]  52.96,57.09 0 top
LOGO31  LOGO-SFENW2  [SFE-NEW-WEB]  82.2,57.4 0 bottom
LOGO32  LOGO-SFESK  [SFE-LOGO-FLAME]  73.79,57.09 0 top
LOGO33  LOGO-SFENW2  [SFE-NEW-WEB]  103.03,57.4 0 bottom
LOGO34  LOGO-SFESK  [SFE-LOGO-FLAME]  94.61,57.09 0 top
LOGO35  LOGO-SFENW2  [SFE-NEW-WEB]  123.86,57.4 0 bottom
LOGO36  LOGO-SFESK  [SFE-LOGO-FLAME]  115.44,57.09 0 top
LOGO37  LOGO-SFENW2  [SFE-NEW-WEB]  19.72,78.23 0 bottom
LOGO38  LOGO-SFESK  [SFE-LOGO-FLAME]  11.3,77.91 0 top
LOGO39  LOGO-SFENW2  [SFE-NEW-WEB]  40.54,78.23 0 bottom
LOGO40  LOGO-SFESK  [SFE-LOGO-FLAME]  32.13,77.91 0 top
LOGO41  LOGO-SFENW2  [SFE-NEW-WEB]  61.37,78.23 0 bottom
LOGO42  LOGO-SFESK  [SFE-LOGO-FLAME]  52.96,77.91 0 top
LOGO43  LOGO-SFENW2  [SFE-NEW-WEB]  82.2,78.23 0 bottom
LOGO44  LOGO-SFESK  [SFE-LOGO-FLAME]  73.79,77.91 0 top
LOGO45  LOGO-SFENW2  [SFE-NEW-WEB]  103.03,78.23 0 bottom
LOGO46  LOGO-SFESK  [SFE-LOGO-FLAME]  94.61,77.91 0 top
LOGO47  LOGO-SFENW2  [SFE-NEW-WEB]  123.86,78.23 0 bottom
LOGO48  LOGO-SFESK  [SFE-LOGO-FLAME]  115.44,77.91 0 top
LOGO49  LOGO-SFENW2  [SFE-NEW-WEB]  19.72,99.06 0 bottom
LOGO50  LOGO-SFESK  [SFE-LOGO-FLAME]  11.3,98.74 0 top
LOGO51  LOGO-SFENW2  [SFE-NEW-WEB]  40.54,99.06 0 bottom
LOGO52  LOGO-SFESK  [SFE-LOGO-FLAME]  32.13,98.74 0 top
LOGO53  LOGO-SFENW2  [SFE-NEW-WEB]  61.37,99.06 0 bottom
LOGO54  LOGO-SFESK  [SFE-LOGO-FLAME]  52.96,98.74 0 top
LOGO55  LOGO-SFENW2  [SFE-NEW-WEB]  82.2,99.06 0 bottom
LOGO56  LOGO-SFESK  [SFE-LOGO-FLAME]  73.79,98.74 0 top
LOGO57  LOGO-SFENW2  [SFE-NEW-WEB]  103.03,99.06 0 bottom
LOGO58  LOGO-SFESK  [SFE-LOGO-FLAME]  94.61,98.74 0 top
LOGO59  LOGO-SFENW2  [SFE-NEW-WEB]  123.86,99.06 0 bottom
LOGO60  LOGO-SFESK  [SFE-LOGO-FLAME]  115.44,98.74 0 top
LOGO61  LOGO-SFENW2  [SFE-NEW-WEB]  19.72,119.89 0 bottom
LOGO62  LOGO-SFESK  [SFE-LOGO-FLAME]  11.3,119.57 0 top
LOGO63  LOGO-SFENW2  [SFE-NEW-WEB]  40.54,119.89 0 bottom
LOGO64  LOGO-SFESK  [SFE-LOGO-FLAME]  32.13,119.57 0 top
LOGO65  LOGO-SFENW2  [SFE-NEW-WEB]  61.37,119.89 0 bottom
LOGO66  LOGO-SFESK  [SFE-LOGO-FLAME]  52.96,119.57 0 top
LOGO67  LOGO-SFENW2  [SFE-NEW-WEB]  82.2,119.89 0 bottom
LOGO68  LOGO-SFESK  [SFE-LOGO-FLAME]  73.79,119.57 0 top
LOGO69  LOGO-SFENW2  [SFE-NEW-WEB]  103.03,119.89 0 bottom
LOGO70  LOGO-SFESK  [SFE-LOGO-FLAME]  94.61,119.57 0 top
LOGO71  LOGO-SFENW2  [SFE-NEW-WEB]  123.86,119.89 0 bottom
LOGO72  LOGO-SFESK  [SFE-LOGO-FLAME]  115.44,119.57 0 top
LOGO73  LOGO-SFENW2  [SFE-NEW-WEB]  19.72,140.72 0 bottom
LOGO74  LOGO-SFESK  [SFE-LOGO-FLAME]  11.3,140.4 0 top
LOGO75  LOGO-SFENW2  [SFE-NEW-WEB]  40.54,140.72 0 bottom
LOGO76  LOGO-SFESK  [SFE-LOGO-FLAME]  32.13,140.4 0 top
LOGO77  LOGO-SFENW2  [SFE-NEW-WEB]  61.37,140.72 0 bottom
LOGO78  LOGO-SFESK  [SFE-LOGO-FLAME]  52.96,140.4 0 top
LOGO79  LOGO-SFENW2  [SFE-NEW-WEB]  82.2,140.72 0 bottom
LOGO80  LOGO-SFESK  [SFE-LOGO-FLAME]  73.79,140.4 0 top
LOGO81  LOGO-SFENW2  [SFE-NEW-WEB]  103.03,140.72 0 bottom
LOGO82  LOGO-SFESK  [SFE-LOGO-FLAME]  94.61,140.4 0 top
LOGO83  LOGO-SFENW2  [SFE-NEW-WEB]  123.86,140.72 0 bottom
LOGO84  LOGO-SFESK  [SFE-LOGO-FLAME]  115.44,140.4 0 top
LOGO85  LOGO-SFENW2  [SFE-NEW-WEB]  19.72,161.54 0 bottom
LOGO86  LOGO-SFESK  [SFE-LOGO-FLAME]  11.3,161.23 0 top
LOGO87  LOGO-SFENW2  [SFE-NEW-WEB]  40.54,161.54 0 bottom
LOGO88  LOGO-SFESK  [SFE-LOGO-FLAME]  32.13,161.23 0 top
LOGO89  LOGO-SFENW2  [SFE-NEW-WEB]  61.37,161.54 0 bottom
LOGO90  LOGO-SFESK  [SFE-LOGO-FLAME]  52.96,161.23 0 top
LOGO91  LOGO-SFENW2  [SFE-NEW-WEB]  82.2,161.54 0 bottom
LOGO92  LOGO-SFESK  [SFE-LOGO-FLAME]  73.79,161.23 0 top
LOGO93  LOGO-SFENW2  [SFE-NEW-WEB]  103.03,161.54 0 bottom
LOGO94  LOGO-SFESK  [SFE-LOGO-FLAME]  94.61,161.23 0 top
LOGO95  LOGO-SFENW2  [SFE-NEW-WEB]  123.86,161.54 0 bottom
LOGO96  LOGO-SFESK  [SFE-LOGO-FLAME]  115.44,161.23 0 top
LOGO97  LOGO-SFENW2  [SFE-NEW-WEB]  19.72,182.37 0 bottom
LOGO98  LOGO-SFESK  [SFE-LOGO-FLAME]  11.3,182.05 0 top
LOGO99  LOGO-SFENW2  [SFE-NEW-WEB]  40.54,182.37 0 bottom
LOGO100  LOGO-SFESK  [SFE-LOGO-FLAME]  32.13,182.05 0 top
LOGO101  LOGO-SFENW2  [SFE-NEW-WEB]  61.37,182.37 0 bottom
LOGO102  LOGO-SFESK  [SFE-LOGO-FLAME]  52.96,182.05 0 top
LOGO103  LOGO-SFENW2  [SFE-NEW-WEB]  82.2,182.37 0 bottom
LOGO104  LOGO-SFESK  [SFE-LOGO-FLAME]  73.79,182.05 0 top
LOGO105  LOGO-SFENW2  [SFE-NEW-WEB]  103.03,182.37 0 bottom
LOGO106  LOGO-SFESK  [SFE-LOGO-FLAME]  94.61,182.05 0 top
LOGO107  LOGO-SFENW2  [SFE-NEW-WEB]  123.86,182.37 0 bottom
LOGO108  LOGO-SFESK  [SFE-LOGO-FLAME]  115.44,182.05 0 top
LOGO109  LOGO-SFENW2  [SFE-NEW-WEB]  19.72,203.2 0 bottom
LOGO110  LOGO-SFESK  [SFE-LOGO-FLAME]  11.3,202.88 0 top
LOGO111  LOGO-SFENW2  [SFE-NEW-WEB]  40.54,203.2 0 bottom
LOGO112  LOGO-SFESK  [SFE-LOGO-FLAME]  32.13,202.88 0 top
LOGO113  LOGO-SFENW2  [SFE-NEW-WEB]  61.37,203.2 0 bottom
LOGO114  LOGO-SFESK  [SFE-LOGO-FLAME]  52.96,202.88 0 top
LOGO115  LOGO-SFENW2  [SFE-NEW-WEB]  82.2,203.2 0 bottom
LOGO116  LOGO-SFESK  [SFE-LOGO-FLAME]  73.79,202.88 0 top
LOGO117  LOGO-SFENW2  [SFE-NEW-WEB]  103.03,203.2 0 bottom
LOGO118  LOGO-SFESK  [SFE-LOGO-FLAME]  94.61,202.88 0 top
LOGO119  LOGO-SFENW2  [SFE-NEW-WEB]  123.86,203.2 0 bottom
LOGO120  LOGO-SFESK  [SFE-LOGO-FLAME]  115.44,202.88 0 top
Q1  MMBT2222A  [SOT23-3]  17.02,11.94 0 top
Q2  MMBT2222A  [SOT23-3]  37.85,11.94 0 top
Q3  MMBT2222A  [SOT23-3]  58.67,11.94 0 top
Q4  MMBT2222A  [SOT23-3]  79.5,11.94 0 top
Q5  MMBT2222A  [SOT23-3]  100.33,11.94 0 top
Q6  MMBT2222A  [SOT23-3]  121.16,11.94 0 top
Q7  MMBT2222A  [SOT23-3]  17.02,32.77 0 top
Q8  MMBT2222A  [SOT23-3]  37.85,32.77 0 top
Q9  MMBT2222A  [SOT23-3]  58.67,32.77 0 top
Q10  MMBT2222A  [SOT23-3]  79.5,32.77 0 top
Q11  MMBT2222A  [SOT23-3]  100.33,32.77 0 top
Q12  MMBT2222A  [SOT23-3]  121.16,32.77 0 top
Q13  MMBT2222A  [SOT23-3]  17.02,53.59 0 top
Q14  MMBT2222A  [SOT23-3]  37.85,53.59 0 top
Q15  MMBT2222A  [SOT23-3]  58.67,53.59 0 top
Q16  MMBT2222A  [SOT23-3]  79.5,53.59 0 top
Q17  MMBT2222A  [SOT23-3]  100.33,53.59 0 top
Q18  MMBT2222A  [SOT23-3]  121.16,53.59 0 top
Q19  MMBT2222A  [SOT23-3]  17.02,74.42 0 top
Q20  MMBT2222A  [SOT23-3]  37.85,74.42 0 top
Q21  MMBT2222A  [SOT23-3]  58.67,74.42 0 top
Q22  MMBT2222A  [SOT23-3]  79.5,74.42 0 top
Q23  MMBT2222A  [SOT23-3]  100.33,74.42 0 top
Q24  MMBT2222A  [SOT23-3]  121.16,74.42 0 top
Q25  MMBT2222A  [SOT23-3]  17.02,95.25 0 top
Q26  MMBT2222A  [SOT23-3]  37.85,95.25 0 top
Q27  MMBT2222A  [SOT23-3]  58.67,95.25 0 top
Q28  MMBT2222A  [SOT23-3]  79.5,95.25 0 top
Q29  MMBT2222A  [SOT23-3]  100.33,95.25 0 top
Q30  MMBT2222A  [SOT23-3]  121.16,95.25 0 top
Q31  MMBT2222A  [SOT23-3]  17.02,116.08 0 top
Q32  MMBT2222A  [SOT23-3]  37.85,116.08 0 top
Q33  MMBT2222A  [SOT23-3]  58.67,116.08 0 top
Q34  MMBT2222A  [SOT23-3]  79.5,116.08 0 top
Q35  MMBT2222A  [SOT23-3]  100.33,116.08 0 top
Q36  MMBT2222A  [SOT23-3]  121.16,116.08 0 top
Q37  MMBT2222A  [SOT23-3]  17.02,136.91 0 top
Q38  MMBT2222A  [SOT23-3]  37.85,136.91 0 top
Q39  MMBT2222A  [SOT23-3]  58.67,136.91 0 top
Q40  MMBT2222A  [SOT23-3]  79.5,136.91 0 top
Q41  MMBT2222A  [SOT23-3]  100.33,136.91 0 top
Q42  MMBT2222A  [SOT23-3]  121.16,136.91 0 top
Q43  MMBT2222A  [SOT23-3]  17.02,157.73 0 top
Q44  MMBT2222A  [SOT23-3]  37.85,157.73 0 top
Q45  MMBT2222A  [SOT23-3]  58.67,157.73 0 top
Q46  MMBT2222A  [SOT23-3]  79.5,157.73 0 top
Q47  MMBT2222A  [SOT23-3]  100.33,157.73 0 top
Q48  MMBT2222A  [SOT23-3]  121.16,157.73 0 top
Q49  MMBT2222A  [SOT23-3]  17.02,178.56 0 top
Q50  MMBT2222A  [SOT23-3]  37.85,178.56 0 top
Q51  MMBT2222A  [SOT23-3]  58.67,178.56 0 top
Q52  MMBT2222A  [SOT23-3]  79.5,178.56 0 top
Q53  MMBT2222A  [SOT23-3]  100.33,178.56 0 top
Q54  MMBT2222A  [SOT23-3]  121.16,178.56 0 top
Q55  MMBT2222A  [SOT23-3]  17.02,199.39 0 top
Q56  MMBT2222A  [SOT23-3]  37.85,199.39 0 top
Q57  MMBT2222A  [SOT23-3]  58.67,199.39 0 top
Q58  MMBT2222A  [SOT23-3]  79.5,199.39 0 top
Q59  MMBT2222A  [SOT23-3]  100.33,199.39 0 top
Q60  MMBT2222A  [SOT23-3]  121.16,199.39 0 top
R1  150K  [0603-RES]  20.83,11.94 270 top
R1A  DNP  [AXIAL-0.3]  20.83,11.94 270 top
R1A1  DNP  [AXIAL-0.3]  41.66,11.94 270 top
R1A2  DNP  [AXIAL-0.3]  62.48,11.94 270 top
R1A3  DNP  [AXIAL-0.3]  83.31,11.94 270 top
R1A4  DNP  [AXIAL-0.3]  104.14,11.94 270 top
R1A5  DNP  [AXIAL-0.3]  124.97,11.94 270 top
R1A6  DNP  [AXIAL-0.3]  20.83,32.77 270 top
R1A7  DNP  [AXIAL-0.3]  41.66,32.77 270 top
R1A8  DNP  [AXIAL-0.3]  62.48,32.77 270 top
R1A9  DNP  [AXIAL-0.3]  83.31,32.77 270 top
R1A10  DNP  [AXIAL-0.3]  104.14,32.77 270 top
R1A11  DNP  [AXIAL-0.3]  124.97,32.77 270 top
R1A12  DNP  [AXIAL-0.3]  20.83,53.59 270 top
R1A13  DNP  [AXIAL-0.3]  41.66,53.59 270 top
R1A14  DNP  [AXIAL-0.3]  62.48,53.59 270 top
R1A15  DNP  [AXIAL-0.3]  83.31,53.59 270 top
R1A16  DNP  [AXIAL-0.3]  104.14,53.59 270 top
R1A17  DNP  [AXIAL-0.3]  124.97,53.59 270 top
R1A18  DNP  [AXIAL-0.3]  20.83,74.42 270 top
R1A19  DNP  [AXIAL-0.3]  41.66,74.42 270 top
R1A20  DNP  [AXIAL-0.3]  62.48,74.42 270 top
R1A21  DNP  [AXIAL-0.3]  83.31,74.42 270 top
R1A22  DNP  [AXIAL-0.3]  104.14,74.42 270 top
R1A23  DNP  [AXIAL-0.3]  124.97,74.42 270 top
R1A24  DNP  [AXIAL-0.3]  20.83,95.25 270 top
R1A25  DNP  [AXIAL-0.3]  41.66,95.25 270 top
R1A26  DNP  [AXIAL-0.3]  62.48,95.25 270 top
R1A27  DNP  [AXIAL-0.3]  83.31,95.25 270 top
R1A28  DNP  [AXIAL-0.3]  104.14,95.25 270 top
R1A29  DNP  [AXIAL-0.3]  124.97,95.25 270 top
R1A30  DNP  [AXIAL-0.3]  20.83,116.08 270 top
R1A31  DNP  [AXIAL-0.3]  41.66,116.08 270 top
R1A32  DNP  [AXIAL-0.3]  62.48,116.08 270 top
R1A33  DNP  [AXIAL-0.3]  83.31,116.08 270 top
R1A34  DNP  [AXIAL-0.3]  104.14,116.08 270 top
R1A35  DNP  [AXIAL-0.3]  124.97,116.08 270 top
R1A36  DNP  [AXIAL-0.3]  20.83,136.91 270 top
R1A37  DNP  [AXIAL-0.3]  41.66,136.91 270 top
R1A38  DNP  [AXIAL-0.3]  62.48,136.91 270 top
R1A39  DNP  [AXIAL-0.3]  83.31,136.91 270 top
R1A40  DNP  [AXIAL-0.3]  104.14,136.91 270 top
R1A41  DNP  [AXIAL-0.3]  124.97,136.91 270 top
R1A42  DNP  [AXIAL-0.3]  20.83,157.73 270 top
R1A43  DNP  [AXIAL-0.3]  41.66,157.73 270 top
R1A44  DNP  [AXIAL-0.3]  62.48,157.73 270 top
R1A45  DNP  [AXIAL-0.3]  83.31,157.73 270 top
R1A46  DNP  [AXIAL-0.3]  104.14,157.73 270 top
R1A47  DNP  [AXIAL-0.3]  124.97,157.73 270 top
R1A48  DNP  [AXIAL-0.3]  20.83,178.56 270 top
R1A49  DNP  [AXIAL-0.3]  41.66,178.56 270 top
R1A50  DNP  [AXIAL-0.3]  62.48,178.56 270 top
R1A51  DNP  [AXIAL-0.3]  83.31,178.56 270 top
R1A52  DNP  [AXIAL-0.3]  104.14,178.56 270 top
R1A53  DNP  [AXIAL-0.3]  124.97,178.56 270 top
R1A54  DNP  [AXIAL-0.3]  20.83,199.39 270 top
R1A55  DNP  [AXIAL-0.3]  41.66,199.39 270 top
R1A56  DNP  [AXIAL-0.3]  62.48,199.39 270 top
R1A57  DNP  [AXIAL-0.3]  83.31,199.39 270 top
R1A58  DNP  [AXIAL-0.3]  104.14,199.39 270 top
R1A59  DNP  [AXIAL-0.3]  124.97,199.39 270 top
R2  150K  [0603-RES]  20.83,22.1 90 top
R2A  DNP  [AXIAL-0.3]  20.83,22.1 90 top
R2A1  DNP  [AXIAL-0.3]  41.66,22.1 90 top
R2A2  DNP  [AXIAL-0.3]  62.48,22.1 90 top
R2A3  DNP  [AXIAL-0.3]  83.31,22.1 90 top
R2A4  DNP  [AXIAL-0.3]  104.14,22.1 90 top
R2A5  DNP  [AXIAL-0.3]  124.97,22.1 90 top
R2A6  DNP  [AXIAL-0.3]  20.83,42.93 90 top
R2A7  DNP  [AXIAL-0.3]  41.66,42.93 90 top
R2A8  DNP  [AXIAL-0.3]  62.48,42.93 90 top
R2A9  DNP  [AXIAL-0.3]  83.31,42.93 90 top
R2A10  DNP  [AXIAL-0.3]  104.14,42.93 90 top
R2A11  DNP  [AXIAL-0.3]  124.97,42.93 90 top
R2A12  DNP  [AXIAL-0.3]  20.83,63.75 90 top
R2A13  DNP  [AXIAL-0.3]  41.66,63.75 90 top
R2A14  DNP  [AXIAL-0.3]  62.48,63.75 90 top
R2A15  DNP  [AXIAL-0.3]  83.31,63.75 90 top
R2A16  DNP  [AXIAL-0.3]  104.14,63.75 90 top
R2A17  DNP  [AXIAL-0.3]  124.97,63.75 90 top
R2A18  DNP  [AXIAL-0.3]  20.83,84.58 90 top
R2A19  DNP  [AXIAL-0.3]  41.66,84.58 90 top
R2A20  DNP  [AXIAL-0.3]  62.48,84.58 90 top
R2A21  DNP  [AXIAL-0.3]  83.31,84.58 90 top
R2A22  DNP  [AXIAL-0.3]  104.14,84.58 90 top
R2A23  DNP  [AXIAL-0.3]  124.97,84.58 90 top
R2A24  DNP  [AXIAL-0.3]  20.83,105.41 90 top
R2A25  DNP  [AXIAL-0.3]  41.66,105.41 90 top
R2A26  DNP  [AXIAL-0.3]  62.48,105.41 90 top
R2A27  DNP  [AXIAL-0.3]  83.31,105.41 90 top
R2A28  DNP  [AXIAL-0.3]  104.14,105.41 90 top
R2A29  DNP  [AXIAL-0.3]  124.97,105.41 90 top
R2A30  DNP  [AXIAL-0.3]  20.83,126.24 90 top
R2A31  DNP  [AXIAL-0.3]  41.66,126.24 90 top
R2A32  DNP  [AXIAL-0.3]  62.48,126.24 90 top
R2A33  DNP  [AXIAL-0.3]  83.31,126.24 90 top
R2A34  DNP  [AXIAL-0.3]  104.14,126.24 90 top
R2A35  DNP  [AXIAL-0.3]  124.97,126.24 90 top
R2A36  DNP  [AXIAL-0.3]  20.83,147.07 90 top
R2A37  DNP  [AXIAL-0.3]  41.66,147.07 90 top
R2A38  DNP  [AXIAL-0.3]  62.48,147.07 90 top
R2A39  DNP  [AXIAL-0.3]  83.31,147.07 90 top
R2A40  DNP  [AXIAL-0.3]  104.14,147.07 90 top
R2A41  DNP  [AXIAL-0.3]  124.97,147.07 90 top
R2A42  DNP  [AXIAL-0.3]  20.83,167.89 90 top
R2A43  DNP  [AXIAL-0.3]  41.66,167.89 90 top
R2A44  DNP  [AXIAL-0.3]  62.48,167.89 90 top
R2A45  DNP  [AXIAL-0.3]  83.31,167.89 90 top
R2A46  DNP  [AXIAL-0.3]  104.14,167.89 90 top
R2A47  DNP  [AXIAL-0.3]  124.97,167.89 90 top
R2A48  DNP  [AXIAL-0.3]  20.83,188.72 90 top
R2A49  DNP  [AXIAL-0.3]  41.66,188.72 90 top
R2A50  DNP  [AXIAL-0.3]  62.48,188.72 90 top
R2A51  DNP  [AXIAL-0.3]  83.31,188.72 90 top
R2A52  DNP  [AXIAL-0.3]  104.14,188.72 90 top
R2A53  DNP  [AXIAL-0.3]  124.97,188.72 90 top
R2A54  DNP  [AXIAL-0.3]  20.83,209.55 90 top
R2A55  DNP  [AXIAL-0.3]  41.66,209.55 90 top
R2A56  DNP  [AXIAL-0.3]  62.48,209.55 90 top
R2A57  DNP  [AXIAL-0.3]  83.31,209.55 90 top
R2A58  DNP  [AXIAL-0.3]  104.14,209.55 90 top
R2A59  DNP  [AXIAL-0.3]  124.97,209.55 90 top
R3  10K  [0603-RES]  14.48,10.35 90 top
R4  330  [0603-RES]  14.48,13.53 270 top
R5  10K  [0603-RES]  12.41,8.13 180 top
R6  10K  [0603-RES]  33.24,8.13 180 top
R7  10K  [0603-RES]  35.31,10.35 90 top
R8  330  [0603-RES]  35.31,13.53 270 top
R9  150K  [0603-RES]  41.66,11.94 270 top
R10  150K  [0603-RES]  41.66,22.1 90 top
R11  10K  [0603-RES]  54.07,8.13 180 top
R12  10K  [0603-RES]  56.13,10.35 90 top
R13  330  [0603-RES]  56.13,13.53 270 top
R14  150K  [0603-RES]  62.48,11.94 270 top
R15  150K  [0603-RES]  62.48,22.1 90 top
R16  10K  [0603-RES]  74.9,8.13 180 top
R17  10K  [0603-RES]  76.96,10.35 90 top
R18  330  [0603-RES]  76.96,13.53 270 top
R19  150K  [0603-RES]  83.31,11.94 270 top
R20  150K  [0603-RES]  83.31,22.1 90 top
R21  10K  [0603-RES]  95.73,8.13 180 top
R22  10K  [0603-RES]  97.79,10.35 90 top
R23  330  [0603-RES]  97.79,13.53 270 top
R24  150K  [0603-RES]  104.14,11.94 270 top
R25  150K  [0603-RES]  104.14,22.1 90 top
R26  10K  [0603-RES]  116.55,8.13 180 top
R27  10K  [0603-RES]  118.62,10.35 90 top
R28  330  [0603-RES]  118.62,13.53 270 top
R29  150K  [0603-RES]  124.97,11.94 270 top
R30  150K  [0603-RES]  124.97,22.1 90 top
R31  10K  [0603-RES]  12.41,28.96 180 top
R32  10K  [0603-RES]  14.48,31.18 90 top
R33  330  [0603-RES]  14.48,34.35 270 top
R34  150K  [0603-RES]  20.83,32.77 270 top
R35  150K  [0603-RES]  20.83,42.93 90 top
R36  10K  [0603-RES]  33.24,28.96 180 top
R37  10K  [0603-RES]  35.31,31.18 90 top
R38  330  [0603-RES]  35.31,34.35 270 top
R39  150K  [0603-RES]  41.66,32.77 270 top
R40  150K  [0603-RES]  41.66,42.93 90 top
R41  10K  [0603-RES]  54.07,28.96 180 top
R42  10K  [0603-RES]  56.13,31.18 90 top
R43  330  [0603-RES]  56.13,34.35 270 top
R44  150K  [0603-RES]  62.48,32.77 270 top
R45  150K  [0603-RES]  62.48,42.93 90 top
R46  10K  [0603-RES]  74.9,28.96 180 top
R47  10K  [0603-RES]  76.96,31.18 90 top
R48  330  [0603-RES]  76.96,34.35 270 top
R49  150K  [0603-RES]  83.31,32.77 270 top
R50  150K  [0603-RES]  83.31,42.93 90 top
R51  10K  [0603-RES]  95.73,28.96 180 top
R52  10K  [0603-RES]  97.79,31.18 90 top
R53  330  [0603-RES]  97.79,34.35 270 top
R54  150K  [0603-RES]  104.14,32.77 270 top
R55  150K  [0603-RES]  104.14,42.93 90 top
R56  10K  [0603-RES]  116.55,28.96 180 top
R57  10K  [0603-RES]  118.62,31.18 90 top
R58  330  [0603-RES]  118.62,34.35 270 top
R59  150K  [0603-RES]  124.97,32.77 270 top
R60  150K  [0603-RES]  124.97,42.93 90 top
R61  10K  [0603-RES]  12.41,49.78 180 top
R62  10K  [0603-RES]  14.48,52.01 90 top
R63  330  [0603-RES]  14.48,55.18 270 top
R64  150K  [0603-RES]  20.83,53.59 270 top
R65  150K  [0603-RES]  20.83,63.75 90 top
R66  10K  [0603-RES]  33.24,49.78 180 top
R67  10K  [0603-RES]  35.31,52.01 90 top
R68  330  [0603-RES]  35.31,55.18 270 top
R69  150K  [0603-RES]  41.66,53.59 270 top
R70  150K  [0603-RES]  41.66,63.75 90 top
R71  10K  [0603-RES]  54.07,49.78 180 top
R72  10K  [0603-RES]  56.13,52.01 90 top
R73  330  [0603-RES]  56.13,55.18 270 top
R74  150K  [0603-RES]  62.48,53.59 270 top
R75  150K  [0603-RES]  62.48,63.75 90 top
R76  10K  [0603-RES]  74.9,49.78 180 top
R77  10K  [0603-RES]  76.96,52.01 90 top